# Altium PCB PCB3.PcbDoc (part 1 of 2)
Units mil, origin at the board's own origin, x right, y up, seen from the top; angles counter-clockwise.
Board outline 6000 x 4000 mil, 2 copper layers (Top Layer, Bottom Layer); 107 components, 78 nets, 393 pads, 135 vias.
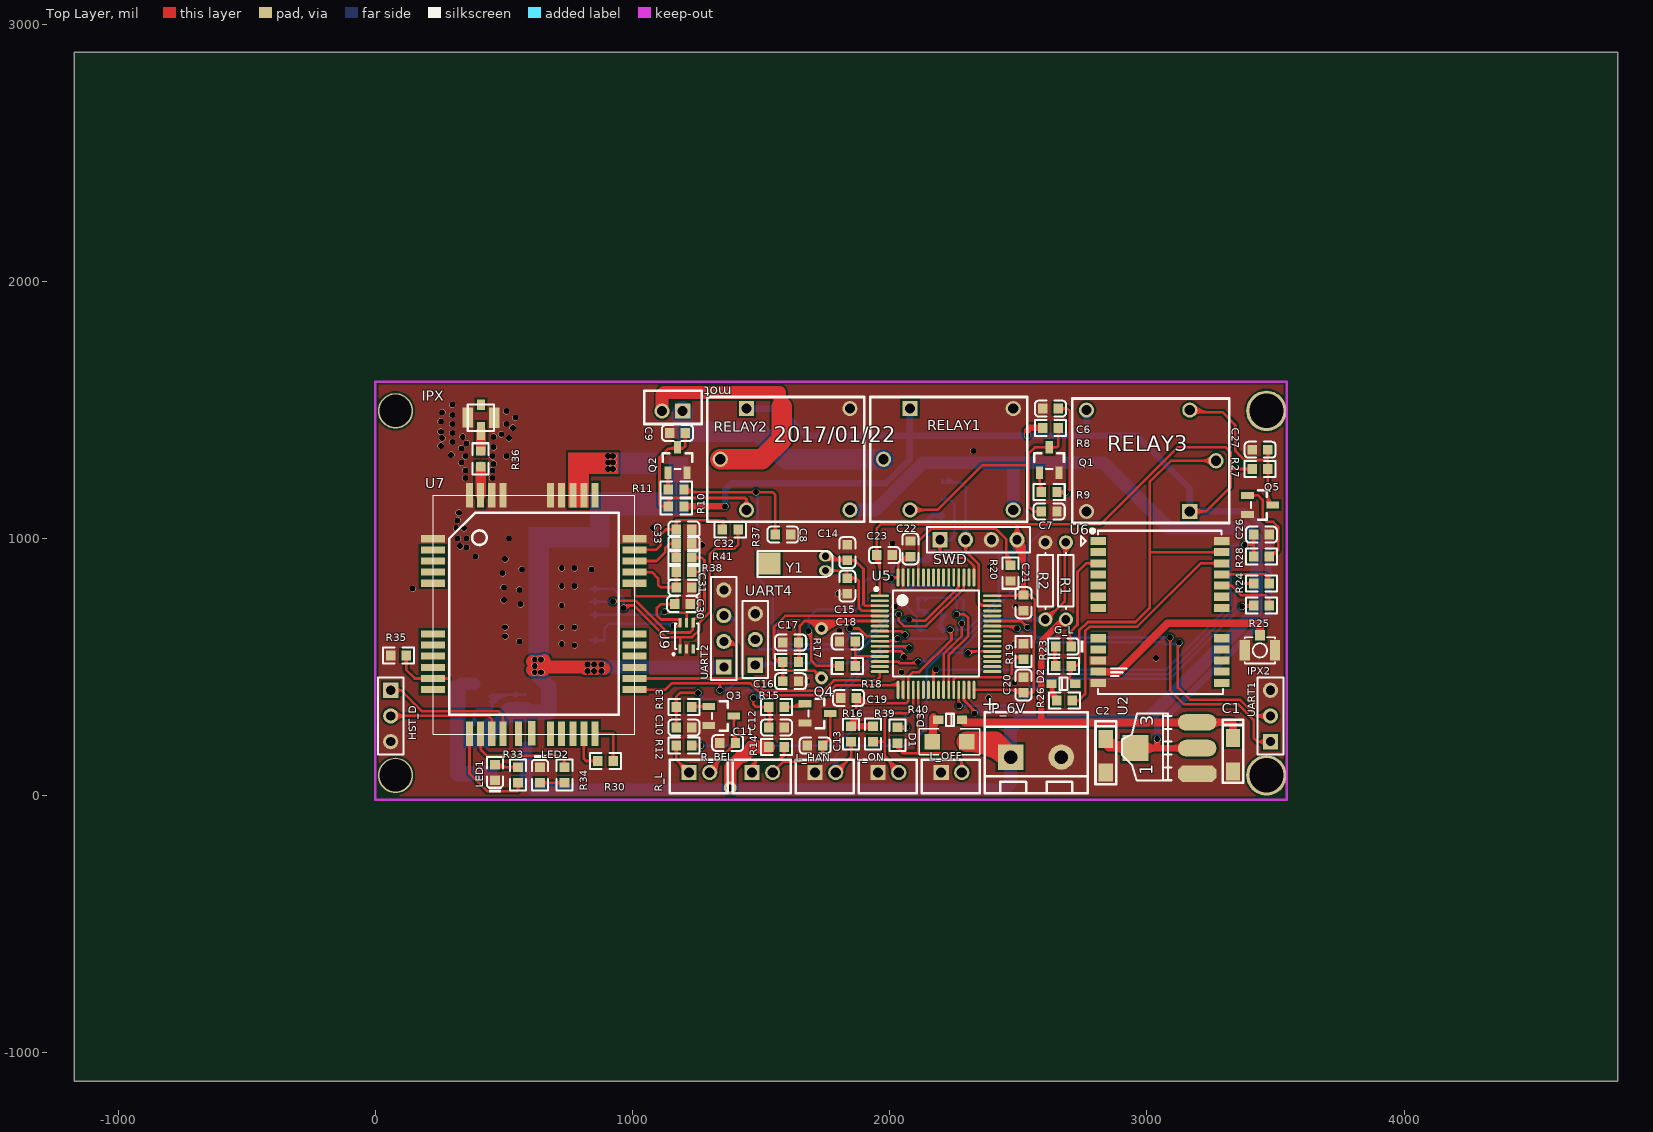
[diagram p0: Top Layer view]
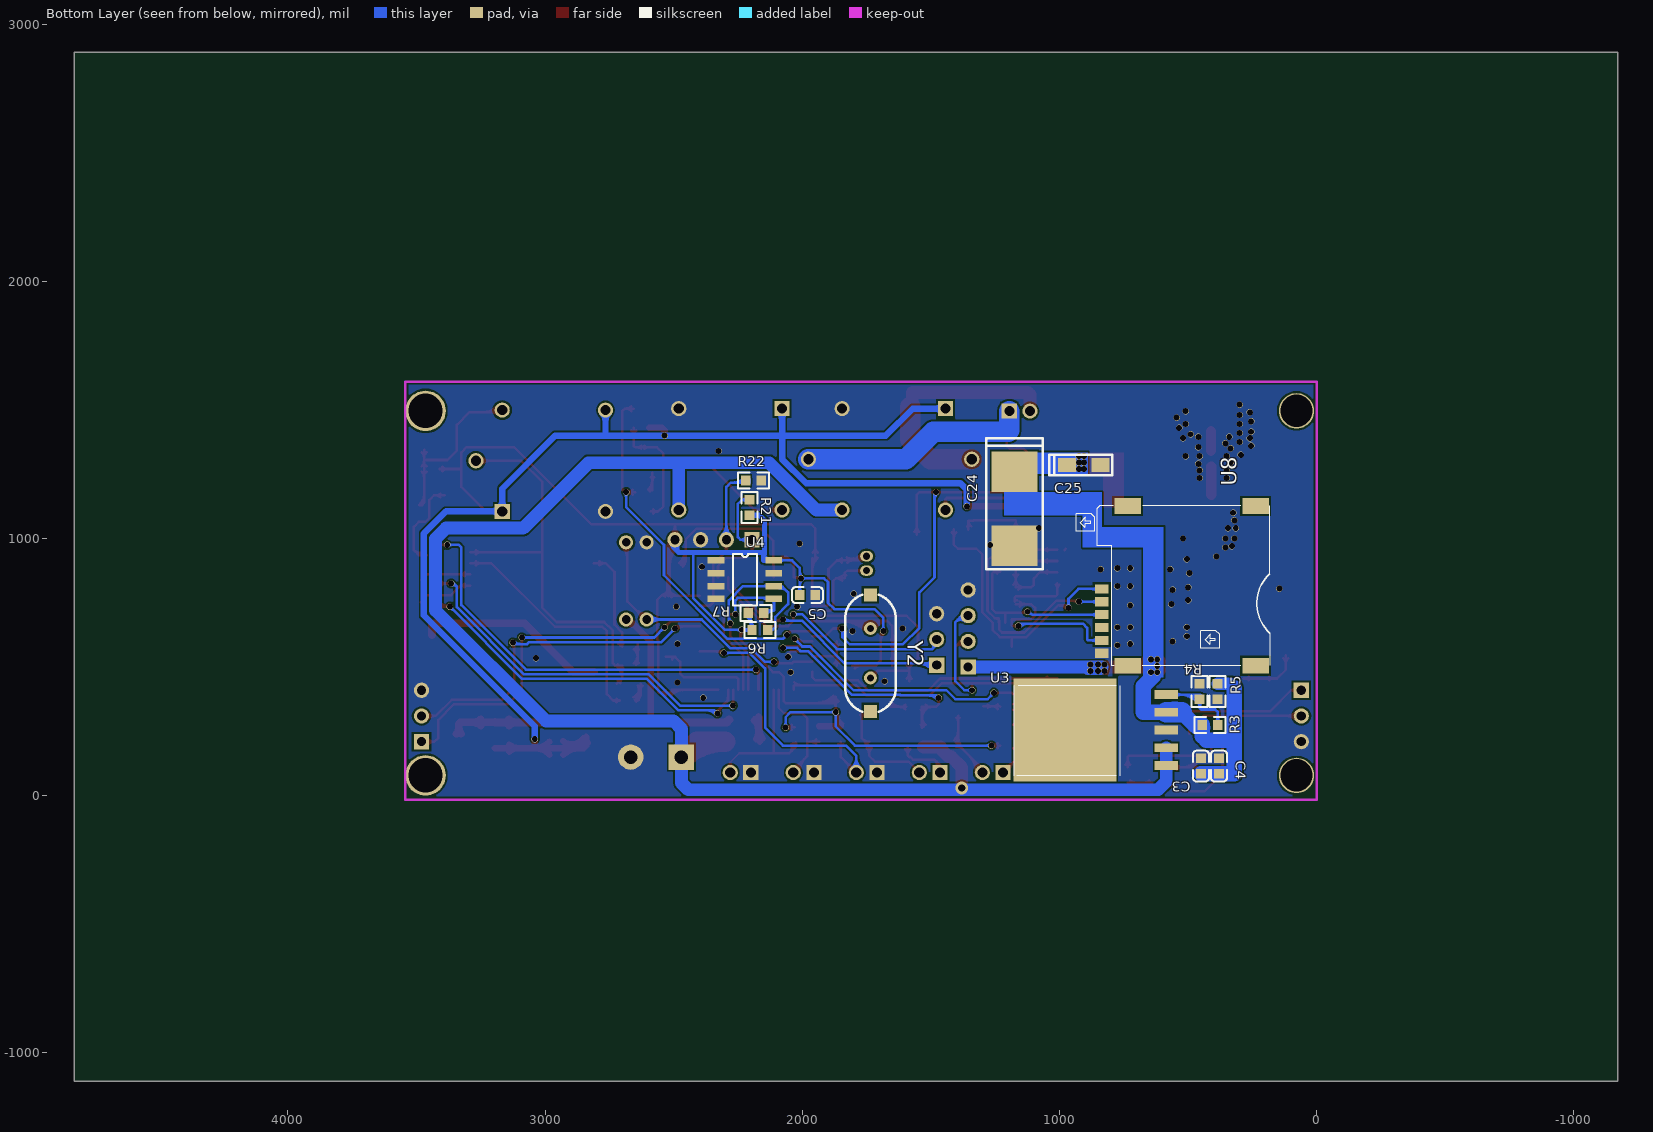
[diagram p1: Bottom Layer view, seen from below]
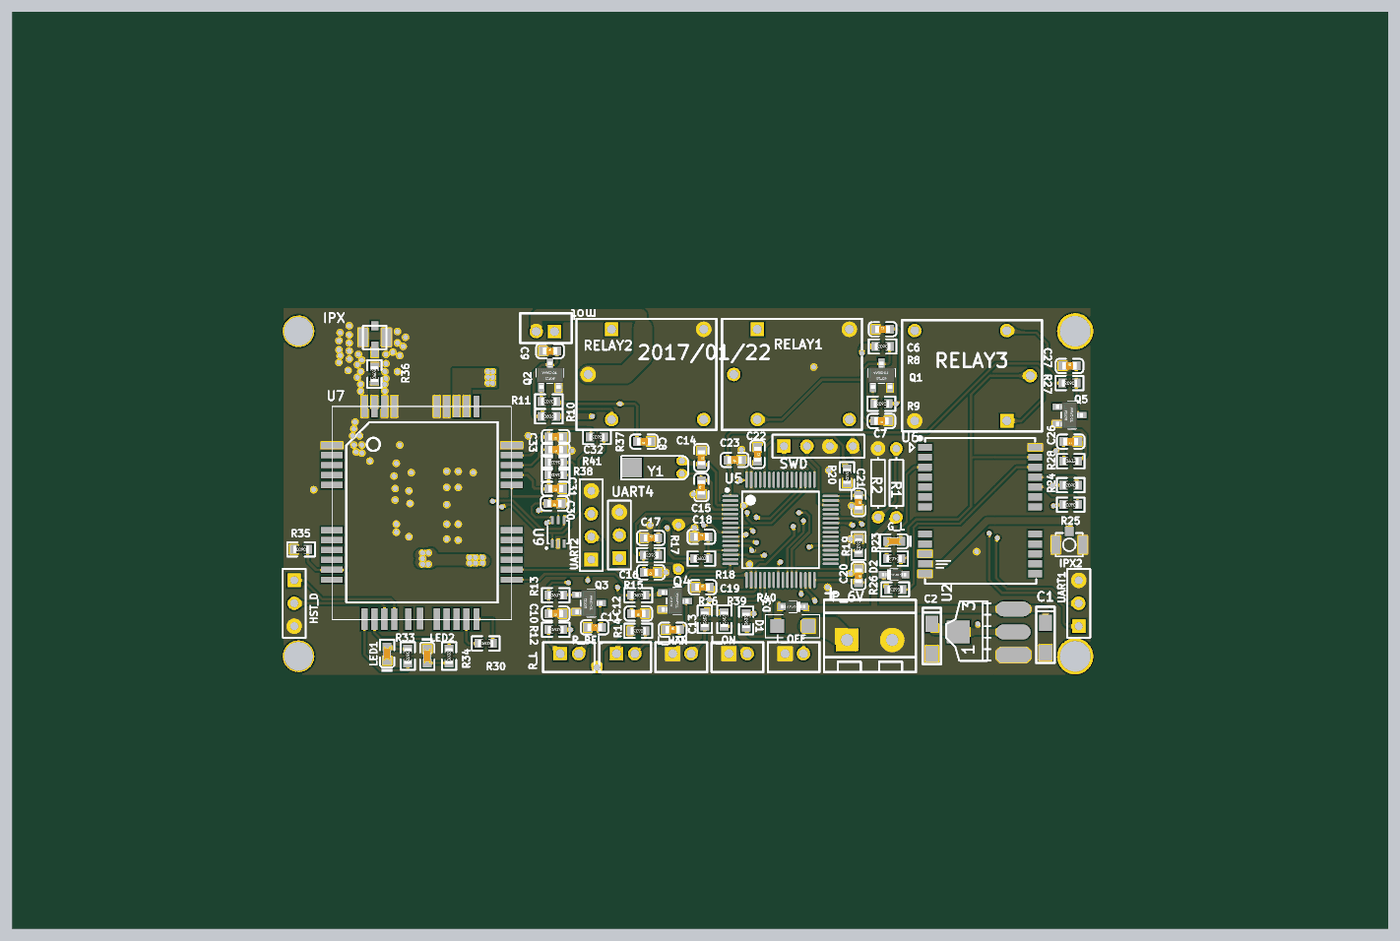
[diagram p3: 3D render of the assembled board from above, using the file's embedded part models]
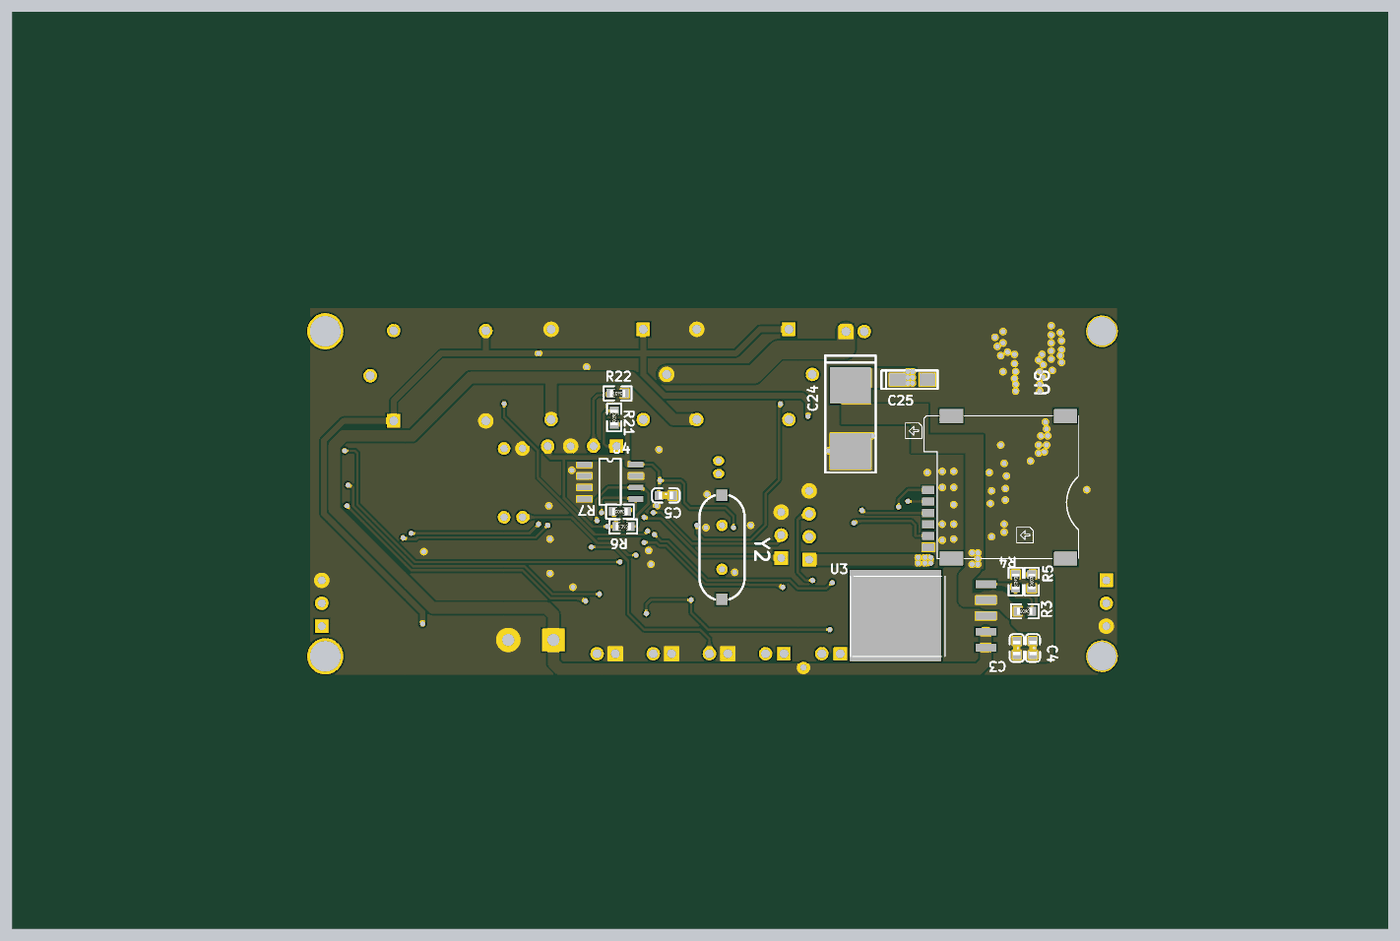
[diagram p4: 3D render of the assembled board from below, using the file's embedded part models]

## Layer stack, top to bottom
Top Layer: signal copper 1.4
Dielectric: core 12.6, FR-4, Dk 4.8
Bottom Layer: signal copper 1.4

## Board outline
-1170,-1110 4830,-1110 4830,2890 -1170,2890

## Design rules (kind name [scope] priority, off if disabled: settings)
Clearance [All] p1: gap=8
PolygonConnect [All] p1: connectstyle=Direct reliefconductorwidth=10 reliefentries=4 polygonreliefangle="90 Angle"
RoutingVias [All] p1: holewidth=20 width=30 viastyle="Through Hole" minholewidth=20 minwidth=20 maxholewidth=23 maxwidth=25
SilkscreenOverComponentPads [All] p1: minsilkscreentomaskgap=10
SolderMaskExpansion [All] p1: expansion=4
Width [All] p1: maxlimit=100 minlimit=10 preferedwidth=10
27 further rules are at their usual default settings.

## Components (designator, comment, footprint, x,y, rotation, side; value= is the part's Value field where it differs from the comment)
C1 "10uF" TANCAP 3335,225 r270 top
C2 "10uF" TANCAP 2840,220 r270 top
C3 "10uF (106) 10% 10V" 0603_C 450,115 r270 bottom
C4 "100nF (104) 10% 50V" 0603_C 380,115 r270 bottom
C5 "100nF (104) 10% 50V" 0603_C 1980,780 r180 bottom
C6 "100nF (104) 10% 50V" 0603_C 2625,1505 r0 top
C7 "100nF (104) 10% 50V" 0603_C 2620,1105 r180 top
C8 "100nF (104) 10% 50V" 0603_C 1585,1015 r180 top
C9 "100nF (104) 10% 50V" 0603_C 1175,1410 r0 top
C10 "100nF (104) 10% 50V" 0603_C 1200,265 r180 top
C11 "100nF (104) 10% 50V" 0603_C 1370,205 r0 top
C12 "100nF (104) 10% 50V" 0603_C 1560,265 r180 top
C13 "100nF (104) 10% 50V" 0603_C 1710,195 r0 top
C14 "10pF (100) 5% 50V" 0603_C 1835,945 r270 top
C15 "10pF (100) 5% 50V" 0603_C 1835,815 r90 top
C16 "22pF (220) 5% 50V" 0603_C 1615,445 r180 top
C17 "22pF (220) 5% 50V" 0603_C 1615,595 r0 top
C18 "100nF (104) 10% 50V" 0603_C 1835,600 r0 top
C19 "100nF (104) 10% 50V" 0603_C 1840,380 r0 top
C20 "100nF (104) 10% 50V" 0603_C 2520,430 r270 top
C21 "100nF (104) 10% 50V" 0603_C 2520,750 r270 top
C22 "100nF (104) 10% 50V" 0603_C 2080,960 r270 top
C23 "104" 0603_C 1980,935 r180 top
C24 "100uF (D)" 7343 1175,1260 r270 bottom
C25 "10uF (106) 10% 10V" TanCap 970,1285 r180 bottom
C26 "100nF (104) 10% 50V" 0603_C 3445,1015 r180 top
C27 "100nF (104) 10% 50V" 0603_C 3440,1345 r0 top
C30 "100nF (104) 10% 50V" 0603_C 1195,745 r180 top
C31 "33pF (330) 5% 50V" 0603_C 1200,810 r180 top
C32 "33pF (330) 5% 50V" 0603_C 1200,980 r180 top
C33 "33pF (330) 5% 50V" 0603_C 1200,1035 r180 top
D1 "SMB6V1A" 1206 2300,210 r180 top
D2 "1N4148WS T4" SOD-323 2675,435 r0 top
D3 "1N4148WS T4" SOD-323 2235,295 r180 top
G_L "*" 0603_LED_S1 2675,580 r180 top
HST_D "Header 3" HDR1X3 60,410 r270 top
IPX "Header 3" IPX 360,1470 r180 top
IPX2 "IPEX" IPEX 3380,565 r0 top
L_HAN "Header 2" COM2 1710,90 r0 top
L_OFF "Header 2" COM2 2200,90 r0 top
L_ON "Header 2" COM2 1955,90 r0 top
LED1 "*" 0603_LED_S1 465,90 r90 top
LED2 "*" 0603_LED_S1 640,80 r270 top
mot "Header 2" COM2 1195,1495 r180 top
P_6V "Header 2" HEAD2L-0.8 2470,150 r0 top
Q1 "SS8050 Y1" SOT-23(SOT-23-3) 2620,1305 r270 top
Q2 "SS8050 Y1" SOT-23(SOT-23-3) 1175,1305 r270 top
Q3 "SS8050 Y1" SOT-23(SOT-23-3) 1345,310 r180 top
Q4 "SS8050 Y1" SOT-23(SOT-23-3) 1720,320 r180 top
Q5 "SS8050 Y1" SOT-23(SOT-23-3) 3440,1130 r180 top
R1 "Res3" AXIAL-0.3 2685,835 r270 top
R2 "1K" AXIAL-0.3 2605,835 r90 top
R3 "100KΩ (1003) ±1%" 0603_R 415,275 r0 bottom
R4 "43KΩ (4302) ±1%" 0603_R 455,405 r270 bottom
R5 "470Ω (4700) ±1%" 0603_R 385,405 r90 bottom
R6 "1KΩ (1001) ±1%" 0603_R 2165,645 r0 bottom
R7 "1KΩ (1001) ±1%" 0603_R 2180,710 r0 bottom
R8 "10KΩ (1002) ±1%" 0603_R 2625,1430 r180 top
R9 "10KΩ (1002) ±1%" 0603_R 2620,1180 r180 top
R10 "10KΩ (1002) ±1%" 0603_R 1170,1125 r0 top
R11 "10KΩ (1002) ±1%" 0603_R 1170,1190 r180 top
R12 "10KΩ (1002) ±1%" 0603_R 1200,195 r0 top
R13 "1KΩ (1001) ±1%" 0603_R 1200,345 r0 top
R14 "0Ω (0) ±1%" 0603_R 1560,190 r180 top
R15 "1KΩ (1001) ±1%" 0603_R 1560,345 r0 top
R16 "*" 0603_R 1850,240 r90 top
R17 "1.5KΩ (1501) ±1%" 0603_R 1615,520 r180 top
R18 "0Ω (0R0) ±1%" 0603_R 1835,505 r0 top
R19 "0Ω (0R0) ±1%" 0603_R 2520,560 r270 top
R20 "0Ω (0R0) ±1%" 0603_R 2470,865 r270 top
R21 "*" 0603_R 2205,1120 r270 bottom
R22 "*" 0603_R 2190,1225 r0 bottom
R23 "510Ω (5100) ±1%" 0603_R 2675,505 r180 top
R24 "510R" 0603_R 3445,825 r180 top
R25 "510R" 0603_R 3445,740 r180 top
R26 "120Ω (1200) ±1%" 0603_R 2680,370 r180 top
R27 "10KΩ (1002) ±1%" 0603_R 3440,1270 r180 top
R28 "1KΩ (1001) ±1%" 0603_R 3445,930 r0 top
R30 "10KΩ (1002) ±1%" 0603_R 895,135 r0 top
R33 "1KΩ (1001) ±1%" 0603_R 555,80 r270 top
R34 "1KΩ (1001) ±1%" 0603_R 735,80 r90 top
R35 "0Ω (0R0) ±1%" 0603_R 90,545 r180 top
R36 "0Ω (0R0) ±1%" 0603_R 410,1309.69 r90 top
R37 "22Ω (22R0) ±1%" 0603_R 1380,1035 r180 top
R38 "22Ω (22R0) ±1%" 0603_R 1200,870 r180 top
R39 "*" 0603_R 1935,240 r90 top
R40 "*" 0603_R 2030,235 r90 top
R41 "22Ω (22R0) ±1%" 0603_R 1200,925 r180 top
R_BEL "Header 2" COM2 1465,90 r0 top
R_L "Header 2" COM2 1220,90 r0 top
RELAY1 "DED-T78-DC5VH-CS" SRA-05VDC-CL 1925,1550 r0 top
RELAY2 "DED-T78-DC5VH-CS" SRA-05VDC-CL 1290,1550 r0 top
RELAY3 "DED-T78-DC5VH-CS" SRA-05VDC-CL 3320,1060 r180 top
SWD "Header 4" HDR1X4 2195,995 r0 top
U2 "AMS1117-3.3" AMS1117 3195,85 r90 top
U3 "MIC2930BU" D2PAK 585,117 r90 bottom
U4 "24C02" SOP-8 2335,915 r180 bottom
U5 "STM32F103RCT6" LC-LQFP-64_10x10x05P 2180,630 r270 top
U6 "SkyTra_S1216F8-BD" GPS_NEO-6 2810,990 r0 top
U7 "G3524" PCBComponent_1 640,940 r0 top
U8 "Micro SIM" "Micro SIM" 735,505 r90 bottom
U9 "SMF05C" SMF05C 1185,570 r90 top
UART1 "Header 3" HDR1X3 3480,210 r90 top
UART2 "Header 4" HDR1X4 1355,500 r90 top
UART4 "Header 3" HDR1X3 1477.39,507.39 r90 top
Y1 "32.768KHz" XTAL32 1750,875 r180 top
Y2 "12MHz" XTAL_US 1735,650 r270 bottom

## Footprints (in the part's own frame and the unit in brackets; to place one, negate y for a bottom-side part, rotate by r counter-clockwise, add the part's x,y. Pads: shape width x height; smd on the part's side, far side on the other; paste and mask are expansions set on the pad)
0603_C [mm]
  rect 0.93x0.98 smd: 1(-0.77,0) 2(0.77,0)
  silkscreen extent -1.53,-0.79 1.54,0.79, body extent -0.8,-0.4 0.8,0.4, height 0.3
0603_LED_S1 [mm]
  rect 0.93x0.98 smd: A(0.77,0) K(-0.77,0)
  silkscreen extent -1.98,-0.79 1.54,0.79, body extent -0.8,-0.4 0.8,0.4, height 0.6
0603_R [mm]
  rect 0.93x0.98 smd: 1(-0.77,0) 2(0.77,0)
  silkscreen extent -1.53,-0.79 1.54,0.79, body extent -0.85,-0.4 0.85,0.4, height 0.56
1206 [mil]
  rect 60x60 smd: 1(0,0) 2(135,0)
  silkscreen extent -50,-50 185,50
7343 [mm]
  rect 4x4.5 smd: 1(0,0) 2(7.3,0)
  silkscreen extent -3.3,-2.79 9.65,2.79
AMS1117 [mil]
  oct 65x150 smd: 1(0.03,-0.06)
  oval 65x150 smd: 2(100.03,-0.06) 3(200.03,-0.06)
  rect 100x100 smd: 4(100.03,239.94)
  silkscreen extent -26,100 234,293
AXIAL-0.3 [mm] "Axial Device, Thru-Hole; 2 Leads; 0.3 in Pin Spacing"
  round 1.4 hole 0.85: 1(-3.81,0) 2(3.81,0)
  silkscreen extent -2.77,-0.76 2.77,0.76
COM2 [mm]
  rect 1.5x1.5 hole 1: 1(0,0)
  round 1.5 hole 1: 2(2.032,0)
  silkscreen extent -1.91,-2.03 3.81,1.27
D2PAK [mil]
  rect 34x90 smd: 1(0,0) 2(69,0) 3(138,0) 4(207,0) 5(276,0)
  rect 400x400 smd: ""(139,394)
  silkscreen extent -40,178 311,590
GPS_NEO-6 [mm]
  rect 1.524x0.8 smd: 1(0,0) 2(0,-1.1) 3(0,-2.2) 4(0,-3.3) 5(0,-4.4) 6(0,-5.5) 7(0,-6.6) 8(0,-9.6) 9(0,-10.7) 10(0,-11.8) 11(0,-12.9) 12(0,-14) 13(12.2,-14) 14(12.2,-12.9) 15(12.2,-11.8) 16(12.2,-10.7) 17(12.2,-9.6) 18(12.2,-6.6) 19(12.2,-5.5) 20(12.2,-4.4) 21(12.2,-3.3) 22(12.2,-2.2) 23(12.2,-1.1) 24(12.2,0)
  silkscreen extent -1.7,-15.11 12.32,1.15
HDR1X3 [mm] "Connector; Header; 3 Position"
  rect 1.5x1.5 hole 0.9: 1(0,0)
  round 1.5 hole 0.9: 2(2.54,0) 3(5.08,0)
  silkscreen extent -1.27,-1.27 6.35,1.27
HDR1X4 [mm] "Connector; Header; 4 Position"
  rect 1.5x1.5 hole 0.9: 1(0,0)
  round 1.5 hole 0.9: 2(2.54,0) 3(5.08,0) 4(7.62,0)
  silkscreen extent -1.27,-1.27 8.89,1.27
HEAD2L-0.8 [mm]
  rect 2.5x2.5 hole 1.35: 1(0,0)
  round 2.5 hole 1.35: 2(5,0)
  silkscreen extent -2.54,-3.56 7.62,4.44
IPEX [mm]
  rect 1x2 smd: 1(0,0) 3(3,0)
  rect 1x1.05 smd: 2(1.5,1.5)
  silkscreen extent 0,-1.3 3,1.3
IPX [mm]
  rect 1.054x2 smd: 1(0.009,0) 3(-2.591,0.025)
  rect 0.8x1.754 smd: 2(-1.295,1.33)
  rect 0.8x1 smd: ""(-1.295,-1.27)
  silkscreen extent -2.59,-1.27 0.01,1.33
LC-LQFP-64_10x10x05P [mm]
  oval 0.28x1.8 smd mask+0.051: 1(-3.75,-5.55) 2(-3.25,-5.55) 3(-2.75,-5.55) 4(-2.25,-5.55) 5(-1.75,-5.55) 6(-1.25,-5.55) 7(-0.75,-5.55) 8(-0.25,-5.55) 9(0.25,-5.55) 10(0.75,-5.55) 11(1.25,-5.55) 12(1.75,-5.55) 13(2.25,-5.55) 14(2.75,-5.55) 15(3.25,-5.55) 16(3.75,-5.55) 33(3.75,5.55) 34(3.25,5.55) 35(2.75,5.55) 36(2.25,5.55) 37(1.75,5.55) 38(1.25,5.55) 39(0.75,5.55) 40(0.25,5.55) 41(-0.25,5.55) 42(-0.75,5.55) 43(-1.25,5.55) 44(-1.75,5.55) 45(-2.25,5.55) 46(-2.75,5.55) 47(-3.25,5.55) 48(-3.75,5.55)
  oval 1.8x0.28 smd mask+0.051: 17(5.55,-3.75) 18(5.55,-3.25) 19(5.55,-2.75) 20(5.55,-2.25) 21(5.55,-1.75) 22(5.55,-1.25) 23(5.55,-0.75) 24(5.55,-0.25) 25(5.55,0.25) 26(5.55,0.75) 27(5.55,1.25) 28(5.55,1.75) 29(5.55,2.25) 30(5.55,2.75) 31(5.55,3.25) 32(5.55,3.75) 49(-5.55,3.75) 50(-5.55,3.25) 51(-5.55,2.75) 52(-5.55,2.25) 53(-5.55,1.75) 54(-5.55,1.25) 55(-5.55,0.75) 56(-5.55,0.25) 57(-5.55,-0.25) 58(-5.55,-0.75) 59(-5.55,-1.25) 60(-5.55,-1.75) 61(-5.55,-2.25) 62(-5.55,-2.75) 63(-5.55,-3.25) 64(-5.55,-3.75)
  silkscreen extent -4.55,-6.05 4.25,4.25
"Micro SIM" [mm] "6P 自?"
  rect 0.9x1.34 smd: 1(1.24,2.565) 2(2.51,2.565) 3(3.78,2.565) 4(5.05,2.565) 5(6.32,2.565) 6(7.59,2.565)
  rect 1.56x2.61 smd: ""(0,-12.63) ""(0,0) ""(15.78,-12.63) ""(15.78,0)
  silkscreen extent 0,-14.06 15.82,5.08
PCBComponent_1 [mm]
  rect 2.4x0.7 smd: 1(-10.55,1.5) 2(-10.55,0.4) 3(-10.55,-0.7) 4(-10.55,-1.8) 5(-10.55,-2.9) 6(-10.55,-7.9) 7(-10.55,-9) 8(-10.55,-10.1) 9(-10.55,-11.2) 10(-10.55,-12.3) 11(-10.55,-13.4) 21(9.35,-13.4) 22(9.35,-12.3) 23(9.35,-11.2) 24(9.35,-10.1) 25(9.35,-9) 26(9.35,-7.9) 27(9.35,-2.9) 28(9.35,-1.8) 29(9.35,-0.7) 30(9.35,0.4) 31(9.35,1.5)
  rect 0.7x2.4 smd: 12(-6.95,-17.75) 13(-5.85,-17.75) 14(-4.75,-17.75) 15(-3.65,-17.75) 16(1.05,-17.75) 17(2.15,-17.75) 18(3.25,-17.75) 19(4.35,-17.75) 20(5.45,-17.75) 32(5.45,5.8) 33(4.35,5.8) 34(3.25,5.8) 35(2.15,5.8) 36(1.05,5.8) 37(-3.65,5.8) 38(-4.75,5.8) 39(-5.85,5.8) 40(-6.95,5.8) 41(-2.1,-17.75) 42(-0.8,-17.7)
  silkscreen extent -10.55,-17.8 9.35,5.8
SMF05C [mm] "SOT-363"
  rect 0.9x0.3 smd: 1(0,0) 2(0,-0.65) 3(0,-1.3) 4(2.6,-1.3) 5(2.6,-0.65) 6(2.6,0)
  silkscreen extent -0.51,-1.84 2.54,0.64
SOD-323 [mm]
  rect 1x0.83 smd: 1(1.18,0) 2(-1.18,0)
  silkscreen extent -0.4,-0.6 0.4,0.6, body extent -1.35,-0.62 1.35,0.63, height 1.1
SOP-8 [mil]
  rect 65x25 smd: 1(0,0) 2(0,-50) 3(0,-100) 4(0,-150) 5(224.41,-150) 6(224.41,-100) 7(224.41,-50) 8(224.41,0)
  silkscreen extent 65,-175 159,25
SOT-23(SOT-23-3) [mm]
  rect 1.25x0.7 smd: 1(1.25,-0.95) 2(1.25,0.95) 3(-1.25,0)
  silkscreen extent -0.65,-1.46 0.9,1.46, body extent -1.5,-1.5 1.5,1.5, height 1.3
SRA-05VDC-CL [mm]
  rect 1.5x1.5 hole 1: 1(3.9,-1.15)
  round 1.5 hole 1: 2(1.302,-6.15) 3(3.9,-11.15) 4(14.1,-11.15) 5(14.1,-1.15)
  silkscreen extent 0,-12.3 15.5,0
TANCAP [mil]
  rect 70x55 smd: 1(0,0) 2(130,0)
  silkscreen extent -70,-40 175,40
TanCap [mil]
  rect 70x55 smd: 1(0,0) 2(130,0)
  silkscreen extent -70,-40 175,40
XTAL32 [mil]
  oval 50x40 hole 28: 1(0,0) 2(0,-56)
  rect 92.13x86 smd: ""(220,-27)
  silkscreen extent -28,-77 264,25
XTAL_US [mil]
  round 50 hole 28: 1(0,0) 2(192.13,0)
  rect 50x50 smd: ""(-130.32,0) ""(322.44,0)
  silkscreen extent -131,-98 323,98

## Part data
C1 C2: library part "CAPACITOR POL", "Capacitor"
C3: library part "0603 10uF (106) 10%", "ÌùÆ¬µ"
C4 C5 C6 C7 C8 C9 C10 C11 C12 C13 C18 C19 C20 C21 C22 C26 C27: library part "0603 100nF (104) 10%", "ÌùÆ¬µ"
C14 C15: library part "0603 10pF (100) 5%", "ÌùÆ¬µ"
C16 C17: library part "0603 22pF (220) 5%", "ÌùÆ¬µ"
C23 C24: library part 0, "ÌùÆ¬µ"
C25: library part "0603 10uF (1", "ÌùÆ¬µ"
C30: library part "0603 100nF (104)", "ÌùÆ¬µ"
C31 C32 C33: library part "0603 33pF (330) 5%", "ÌùÆ¬µ"
D1: library part SMBJ, "T"
D2 D3: library part "SOD-323 1N", "二极"
G_L: library part "0603 红灯", "发光"
HST_D IPX UART1 UART4: "Header, 3-Pin"
IPX2: "IPEX座"
L_HAN L_OFF L_ON mot R_BEL R_L: "Header, 2-Pin"
LED1 LED2: library part 0, "发光二"
P_6V: "Header, 2-P"
Q1 Q2 Q3 Q4 Q5: library part "SOT-23 SS", "三极"
R1: "Resistor"
R2: library part Res3, "Resistor"
R3: library part "0603 100KΩ (100", "贴片"
R4: library part "0603 43KΩ (430", "贴片"
R5: library part "0603 470Ω (470", "贴片"
R6 R7 R13 R15 R28 R33 R34: library part "0603 1KΩ (100", "贴片"
R8 R9 R10 R11 R12 R14 R27 R30: library part "0603 10KΩ (100", "贴片"
R16 R39 R40: library part "0603 4.7KΩ (470", "贴片"
R17: library part "0603 1.5KΩ (150", "贴片"
R18 R19 R20 R35 R36: library part "0603 0Ω (0R", "贴片"
R21 R22: library part 0603, "ÌùÆ¬µ"
R23: library part "0603 510Ω (510", "贴片"
R24 R25: library part R
R26: library part "0603 120Ω (120", "贴片"
R37 R38 R41: library part "0603 22Ω (22R", "贴片"
SWD UART2: "Header, 4-Pin"
U2: library part AMS11
U4: library part 24C2
U5: library part STM
U6: library part SkyTra_GPS
U7: library part Component_1
U9: "TVS"
Y1: library part XT, "Crystal Oscillat"
Y2: library part XT, "Crystal Oscil"

## Free pads (board coordinates)
  round 137.8 hole 125.98: 0(78.74,1496.06) 1(78.74,78.74)
  round 157.48 hole 133.86: 2(3464.57,78.74) 3(3464.57,1496.06)

## Via types
v1: diameter 25, hole 23, Top Layer to Bottom Layer, 134 vias
v2: diameter 50, hole 28, Top Layer to Bottom Layer, 1 vias

## Nets (pads, with @x,y where several pads share a name; then routed paths per layer and width w, separated by ;. In a path a pad name is that pad's centre, name@x,y a point inside that pad or via, vN(x,y) a via of type N, cw(c..) or ccw(c..) an arc to the next point about the centre after c; other vN are vias at no path point)
ADC0: R1.1 R2.1 U5.14 | length 1481.6
  Top Layer w10: U5.14@1961.5,521.73 1962.67,520.56 2034.44,520.56 2040.5,514.5 2104.5,514.5 v1(2110,520) ; 2078.62,514.5 ccw(c2078.62,551.38) v1@2104.7,525.3 ; R2.1@2600,675 2680,755 R1.1@2680,975 ; R2.1@2605,697.56 ccw(c2605,739.95) 2634.98,709.98 ; R2.1@2605,707.56 ccw(c2605,774.09) 2652.05,727.05 ; R2.1@2627.56,685 cw(c2669.95,685) 2639.98,714.98 ; R1.1@2669.05,969.05 cw(c2642.61,942.61) 2680,942.61 cw(c2727.39,942.61) R1.1@2693.88,976.12 ; 2680,918.47 cw(c2751.53,918.47) R1.1@2700.95,969.05
  Bottom Layer w10: v1(2110,520) 2144.54,520 2197.54,573 2278.91,573 2390.91,685 2590,685 R2.1@2600,675 ; v1@2115.3,514.7 cw(c2128.11,501.89) 2128.11,520 cw(c2128.11,538.11) v1@2115.3,525.3 ; R2.1@2589.05,669.05 ccw(c2550.54,630.54) 2550.54,685 ccw(c2550.54,739.46) R2.1@2589.05,700.95 ; R2.1@2596.12,676.12 ccw(c2574.68,654.68) 2574.68,685 ccw(c2574.68,715.32) R2.1@2596.12,693.88
G3524_RESET: U5.25
GND: C1.2 C2.2 C3.1 C4.1 C5.2 C6.1 C7.1 C8.1 C9.1 C10.1 C11.1 C12.1 C13.1 C14.1 C15.1 C16.1 C17.1 C18.1 C19.1 C20.1 C21.2 C22.1 C23.1 C24.2 C25.2 C26.1 C27.1 C30.1 C31.1 C32.1 C33.1 HST_D.3 IPX2.1 IPX2.3 IPX.1 IPX.3 L_HAN.1 L_OFF.1 L_ON.1 LED1.K LED2.K P_6V.2 Q1.2 Q2.2 Q3.2 Q4.2 Q5.2 R2.2 R4.1 R5.1 R19.1 R20.2 R22.1 R35.2 RELAY1.5 RELAY2.5 RELAY3.5 SWD.3 U2.1 U3.3 U4.1 U4.2 U4.3 U4.4 U4.7 U5.12 U5.18 U5.31 U5.47 U5.63 U6.10 U6.12 U6.24 U7.1 U7.31 U7.35 U7.36 U7.37 U7.38 U7.40 U8.1 U9.2 UART1.3 UART2.4 UART4.3 | length 128.1
  Top Layer w10: U5.12@1961.5,561.1 2043.9,561.1 ; v1@2047.96,542.59 ccw(c2031.47,548.67) 2043.9,561.1 ; v1(2055,540) 2055,550 2043.9,561.1
  other v1: 2385,380 2485,440 1680,445 2045,480 3035,535 775,585 725,590 2485,590 560,600 505,620 1805,640 1610,650 505,655 725,655 775,655 2020,735 2490,735 725,740 565,745 500,760 1800,785 560,800 145,805 500,810 725,815 775,815 495,865 570,880 840,880 725,885 775,885 2390,890 505,920 390,930 355,965 330,970 1270,975 2010,980 320,1000 355,1000 520,1000 315,1040 345,1040 1080,1040 320,1070 325,1100 350,1235 455,1235 350,1265 455,1265 460,1290 335,1295 350,1320 455,1320 510,1320 295,1325 2325,1340 335,1350 460,1355 255,1360 355,1370 300,1375 260,1390 520,1390 340,1395 460,1395 490,1405 300,1410 255,1415 535,1430 300,1445 510,1445 255,1455 545,1470 300,1480 260,1490 510,1495 300,1520
GPS_POWER_EN: C26.2 R28.1 U5.24 | length 1963.7
  Top Layer w10: 2170,467.64 cw(c2185.53,467.64) v1@2181.8,482.72 ; 2170,480.42 cw(c2182.37,480.42) v1@2179.4,492.43 ; U5.24@2170.16,411.5 2170.16,469.84 2170,470 2170,490 v1(2180,490) ; v1(3380,975) 3414.69,975 ; v1@3385.3,969.7 cw(c3398.11,956.89) 3398.11,975 cw(c3398.11,993.11) v1@3385.3,980.3 ; R28.1@3405.28,940.39 ccw(c3382.56,963.11) 3414.68,963.11 ccw(c3446.81,963.11) R28.1@3424.09,940.39 ; C26.2@3405.28,1004.61 cw(c3382.56,981.89) 3414.68,981.89 cw(c3446.81,981.89) C26.2@3424.09,1004.61 ; R28.1@3414.69,930 3414.69,975 ; C26.2@3414.69,1015 3414.69,975
  Bottom Layer w10: v1(2180,490) 3074.09,490 3325,740.91 3325,965 3335,975 v1(3380,975) ; v1@2185.3,484.7 cw(c2198.11,471.89) 2198.11,490 cw(c2198.11,508.11) v1@2185.3,495.3 ; v1@3374.7,969.7 ccw(c3361.89,956.89) 3361.89,975 ccw(c3361.89,993.11) v1@3374.7,980.3
GPS_RXD3: R24.2 U5.29 | length 1623.5
  Top Layer w10: v1@2264.7,355.3 ccw(c2255.32,364.68) 2268.58,364.68 ; 2268.58,371.53 ccw(c2291.53,371.53) v1@2275.3,355.3 ; U5.29@2268.58,411.5 2268.58,356.42 2270,355 v1(2270,350) v1@2270,345 ; v1(3365,825) R24.2@3414.68,825 ; v1@3370.3,819.7 cw(c3383.11,806.89) 3383.11,825 cw(c3383.11,843.11) v1@3370.3,830.3 ; R24.2@3405.28,815.59 ccw(c3382.56,792.87) 3382.56,825 ccw(c3382.56,857.13) R24.2@3405.28,834.41
  Bottom Layer w10: v1(2270,350) 2270,340 2280,350 2474.54,350 2596.54,472 3081.54,472 3343,733.46 3343,813 ; v1@2275.3,344.7 cw(c2288.11,331.89) 2288.11,350 cw(c2288.11,368.11) v1@2275.3,355.3 ; v1@3360,830 3343,813 ; v1@3362.75,817.84 ccw(c3356.87,799.13) 3343,813
GPS_TXD3: R25.2 U5.30 | length 1647
  Top Layer w10: U5.30@2288.27,411.5 2288.27,371.73 2330,330 v1(2330,320) v1@2335,320 ; U5.30@2288.78,381.57 ccw(c2313.78,381.57) 2296.1,363.9 ; 2310.13,349.87 cw(c2280.25,320) v1@2322.5,320 ; 2327.2,332.8 cw(c2314.39,320) v1@2332.5,320 ; v1(3370,735) R25.2@3414.68,735 ; v1@3372.86,735 ccw(c3372.86,780.84) R25.2@3405.28,748.43 ; v1@3373.75,741.5 ccw(c3384.07,759.37) 3389.41,739.43 ; v1@3375.3,729.7 cw(c3388.11,716.89) 3388.11,735 cw(c3388.11,753.11) v1@3375.3,740.3 ; v1@3376.5,731.25 cw(c3389.98,723.46) 3385.95,738.51 ; 3392.25,735 cw(c3392.25,716.58) R25.2@3405.28,729.61
  Bottom Layer w10: v1@2328.23,321.77 cw(c2352.94,297.07) 2352.94,332 ; v1(2330,320) 2342,332 2482,332 2604,454 3089,454 v1(3370,735) ; v1@2335.3,314.7 cw(c2377.08,272.92) 2377.08,332 ; v1@3362.5,735 cw(c3344.39,735) 3357.2,722.2 cw(c3370,709.39) v1@3370,727.5
GPS_VCC_EN: D2.1 R23.1 RELAY3.2 U6.23 | length 1930.3
  Top Layer w10: R23.1@2695.91,494.61 cw(c2685.26,483.96) 2700.31,483.96 cw(c2725.37,483.96) R23.1@2707.65,501.68 ; 2700.31,459.82 cw(c2749.51,459.82) R23.1@2714.72,494.61 ; 2704.47,451.99 ccw(c2718.11,465.63) D2.1@2718.11,446.34 ; D2.1@2706.88,436.56 ccw(c2683.93,439.76) 2700.32,456.14 ; R23.1@2717.27,499.16 cw(c2726.62,494.6) 2726.62,505 ; R23.1@2717.27,510.84 ccw(c2726.62,515.4) 2726.62,505 ; D2.1@2721.46,435 2700.31,456.14 ; 3016.69,946.69 U6.23@3290.31,946.69 ; RELAY3.2@3251.4,1284.78 ccw(c3209.53,1242.91) 3209.53,1302.13 ccw(c3209.53,1361.34) RELAY3.2@3251.4,1319.47 ; RELAY3.2@3258.47,1291.85 ccw(c3233.67,1267.05) 3233.67,1302.13 ccw(c3233.67,1337.2) RELAY3.2@3258.47,1312.4 ; U6.23@3268.46,939.09 ccw(c3250.11,920.74) 3250.11,946.69 ccw(c3250.11,972.64) U6.23@3268.46,954.29 ; RELAY3.2@3268.74,1302.13 3092.87,1302.13 3010,1219.25 3010,730.46 2954.82,675.27 2770.27,675.27 2736.62,641.62 2736.62,515 2726.62,505 ; 2700.31,456.14 2700.31,505 2726.62,505
HST_RXD: HST_D.2 U7.14 | length 635.6
  Top Layer w10: HST_D.2@60,310 440,310 452.99,297.01 U7.14@452.99,241.18 ; HST_D.2@70.27,299.73 cw(c95.07,274.93) 95.07,310 cw(c95.07,345.07) HST_D.2@70.27,320.27 ; HST_D.2@77.34,292.66 cw(c119.21,250.79) 119.21,310 cw(c119.21,369.21) HST_D.2@77.34,327.34 ; U7.14@446.78,280.85 ccw(c431.8,295.84) 452.99,295.84 ccw(c474.19,295.84) U7.14@459.2,280.85
HST_TXD: HST_D.1 U7.15 | length 625.6
  Top Layer w10: HST_D.1@60,410 100,410 ; HST_D.1@81.86,398.88 cw(c100,389.65) 100,410 ; HST_D.1@81.86,421.12 ccw(c100,430.35) 100,410 ; U7.15@490.09,280.85 ccw(c475.1,295.84) 496.3,295.84 ccw(c517.49,295.84) U7.15@502.51,280.85 ; U7.15@496.3,241.18 496.3,311.7 480,328 182,328 100,410
IIC_SCL: R6.1 U4.6 U5.26 | length 994.2
  Top Layer w10: U5.26@2209.53,411.5 2209.53,549.98 2280,620.46 v1(2280,670) ; v1@2274.7,664.7 cw(c2261.89,651.89) 2280,651.89 cw(c2298.11,651.89) v1@2285.3,664.7
  Bottom Layer w10: 2059.71,794.71 cw(c2090.59,763.82) U4.6@2090.59,807.5 ; 2076.78,811.78 cw(c2090.59,797.96) U4.6@2090.59,817.5 ; R6.1@2122.34,640.04 ccw(c2115,637.09) 2115,645 ; R6.1@2122.34,649.96 cw(c2115,652.91) 2115,645 ; R6.1@2134.69,645 2115,645 ; U4.6@2135.89,809.7 cw(c2148.7,796.89) 2148.7,815 cw(c2148.7,833.11) U4.6@2135.89,820.3 ; v1@2274.7,675.3 ccw(c2248.62,701.38) 2285.5,701.38 ; v1(2280,670) 2275,670 2285.5,680.5 2285.5,759.5 2230,815 U4.6@2110.59,815 2080,815 2055,790 2055,744.69 2105,694.69 2105,655 2115,645
IIC_SDA: R7.1 U4.5 U5.27 | length 819.8
  Top Layer w10: U5.27@2229.21,411.5 2229.21,544.21 2305.5,620.5 2305.5,690 2290.5,705 v1(2260,705) ; v1@2265.3,699.7 cw(c2278.11,686.89) 2278.11,705 cw(c2278.11,723.11) v1@2265.3,710.3
  Bottom Layer w10: U4.5@2105.29,759.7 cw(c2093.91,748.32) 2110,748.32 ; 2110,745.47 cw(c2130.13,745.47) U4.5@2115.89,759.7 ; 2127.78,720 cw(c2127.78,697.67) R7.1@2146.86,709.27 ; U4.5@2135.89,759.7 cw(c2160.77,734.82) 2160.77,770 ; R7.1@2138.31,704.07 ccw(c2110,686.87) 2110,720 ; R7.1@2139.69,720 2110,720 ; v1@2254.7,710.3 ccw(c2241.89,723.11) 2260,723.11 ccw(c2278.11,723.11) v1@2265.3,710.3 ; v1(2260,705) 2260,759.54 2249.55,770 2110.59,770 2110,769.41 2110,720
LOCK_HAND: L_HAN.2 R16.1 U5.37 | length 1535.8
  Top Layer w10: L_HAN.2@1790,90 1850,150 R16.1@1850,209.69 ; L_HAN.2@1790,104.53 ccw(c1790,139.6) 1814.8,114.8 ccw(c1839.6,90) L_HAN.2@1804.53,90 ; L_HAN.2@1790,114.53 ccw(c1790,173.74) 1831.87,131.87 ccw(c1873.74,90) L_HAN.2@1814.53,90 ; R16.1@1840.59,200.28 cw(c1817.87,177.56) 1850,177.56 cw(c1882.13,177.56) R16.1@1859.41,200.28 ; v1(2305,555) 2301.1,558.9 2301.1,561.1 U5.37@2398.5,561.1 ; v1@2310.3,549.7 cw(c2337.84,522.16) 2337.84,561.1
  Bottom Layer w10: L_HAN.2@1772.66,107.34 ccw(c1730.79,149.21) 1790,149.21 ccw(c1849.21,149.21) L_HAN.2@1807.34,107.34 ; L_HAN.2@1779.73,100.27 ccw(c1754.93,125.07) 1790,125.07 ccw(c1825.07,125.07) L_HAN.2@1800.27,100.27 ; L_HAN.2@1790,90 1790,155 1830,195 2075,195 2144.5,264.5 2144.5,494.5 2205,555 v1(2305,555) ; v1@2299.7,549.7 ccw(c2286.89,536.89) 2286.89,555 ccw(c2286.89,573.11) v1@2299.7,560.3
LOCK_OFF: L_OFF.2 R40.1 U5.21 | length 733.4
  Top Layer w10: R40.1@2024.82,207.29 ccw(c2042.7,199.75) 2028.98,186.02 ; R40.1@2025.04,192.34 cw(c2022.09,185) 2030,185 ; R40.1@2030,204.69 2030,185 ; R40.1@2034.03,203.4 ccw(c2057.49,193.51) 2039.49,175.51 ; R40.1@2034.96,192.34 ccw(c2037.91,185) 2030,185 ; R40.1@2043.25,199.52 ccw(c2072.27,187.28) 2050,165 ; U5.21@2111.1,411.5 2111.1,166.1 2110,165 ; L_OFF.2@2268.88,111.86 ccw(c2259.65,130) 2280,130 ; L_OFF.2@2280,90 2280,130 ; L_OFF.2@2291.12,111.86 cw(c2300.35,130) 2280,130 ; 2030,185 2050,165 ; 2050,165 2110,165 ; 2110,165 2245,165 2280,130
LOCK_ON: L_ON.2 R39.1 U5.20 | length 666.1
  Top Layer w10: R39.1@1935,209.69 1979.69,209.69 ; R39.1@1945.39,200.28 cw(c1968.11,177.56) 1968.11,209.69 cw(c1968.11,241.81) R39.1@1945.39,219.09 ; 1986.06,148.94 cw(c1927.12,90) L_ON.2@2010.47,90 ; 2003.13,131.87 cw(c1961.26,90) L_ON.2@2020.47,90 ; 2010.2,124.8 ccw(c2035,149.6) L_ON.2@2035,114.53 ; L_ON.2@2035,90 2035,100 1980,155 1980,300 2000,320 2070,320 2091.42,341.42 U5.20@2091.42,411.5
MOTO-A: mot.2 RELAY2.2 | length 981.4
  Top Layer w50: mot.2@1115,1495 1115,1560 1122.25,1567.25 1572.25,1567.25 1572.25,1519.75 1580,1512
  Top Layer w80: RELAY2.2@1341.26,1307.87 1502.87,1307.87 1580,1385 1580,1512
MOTO-B: mot.1 RELAY1.2 | length 902.7
  Bottom Layer w80: mot.1@1195,1495 1195,1420 1200,1415 1490,1415 1597.13,1307.87 RELAY1.2@1976.26,1307.87
MOTO_D+: C6.2 R9.1 U5.8 | length 1763.7
  Top Layer w10: U5.8@1961.5,639.84 2039.84,639.84 ; 2040,640 2039.84,639.84 ; v1@2052.5,625 ccw(c2034.39,625) 2047.2,637.8 ccw(c2060,650.61) v1@2060,632.5 ; v1(2060,625) 2045.16,639.84 2039.84,639.84 ; R9.1@2650.31,1180 v1(2685,1180) 2690,1180 2700,1190 ; C6.2@2655.31,1505 2690,1505 2700,1495 2700,1190 ; R9.1@2659.72,1170.59 cw(c2682.44,1147.87) 2682.44,1180 cw(c2682.44,1212.13) R9.1@2659.72,1189.41 ; C6.2@2664.72,1495.59 cw(c2687.44,1472.87) 2687.44,1505 cw(c2687.44,1537.13) C6.2@2664.72,1514.41 ; R9.1@2667.49,1175.99 cw(c2671.71,1160.22) v1@2680.82,1173.77 ; R9.1@2667.49,1184.01 ccw(c2671.71,1199.78) v1@2680.82,1186.23 ; 2668.88,1176.37 ccw(c2664.78,1191.67) v1@2678.5,1183.75 ; 2668.88,1183.63 cw(c2664.78,1168.33) v1@2678.5,1176.25 ; v1@2679.7,1174.7 ccw(c2666.89,1161.89) 2666.89,1180 ccw(c2666.89,1198.11) v1@2679.7,1185.3 ; v1@2687.44,1187.09 ccw(c2691.39,1198.61) 2700,1190
  Bottom Layer w10: v1@2060,617.5 cw(c2060,599.39) 2072.8,612.2 cw(c2085.61,625) v1@2067.5,625 ; v1(2060,625) 2075,610 2290.46,610 2537.53,857.07 2537.53,974.89 2685,1122.36 v1(2685,1180) ; v1@2679.7,1174.7 cw(c2666.89,1161.89) 2685,1161.89 cw(c2703.11,1161.89) v1@2690.3,1174.7
MOTO_D-: C8.2 R11.1 U5.9 | length 1841.5
  Top Layer w10: R11.1@1195.31,1180 v1(1480,1180) 1545,1180 1554.68,1170.32 C8.2@1554.68,1015 ; R11.1@1202.65,1191.35 ccw(c1230.07,1218.77) 1230.07,1180 ; R11.1@1209.72,1198.43 ccw(c1254.21,1242.91) 1254.21,1180 ; v1@1474.7,1174.7 ccw(c1461.89,1161.89) 1461.89,1180 ccw(c1461.89,1198.11) v1@1474.7,1185.3 ; v1@1485.3,1174.7 cw(c1498.11,1161.89) 1498.11,1180 cw(c1498.11,1198.11) v1@1485.3,1185.3 ; C8.2@1545.28,1025.39 ccw(c1522.56,1048.11) 1554.68,1048.11 ccw(c1586.81,1048.11) C8.2@1564.09,1025.39 ; v1(1845,650) 1880,650 1909.84,620.16 U5.9@1961.5,620.16 ; v1@1850.3,644.7 cw(c1863.11,631.89) 1863.11,650 cw(c1863.11,668.11) v1@1850.3,655.3
  Bottom Layer w10: v1@1474.7,1174.7 cw(c1447.24,1147.24) 1486.07,1147.24 ; v1@1486.07,1173.93 1486.07,848.93 1545,790 1545,652.53 1609.53,588 1815.47,588 1843.74,616.26 1843.74,643.74 1841.24,646.24 v1(1845,650) ; v1@1839.7,644.7 cw(c1829.94,634.94) 1843.74,634.94 ; 1843.74,628.84 cw(c1866.16,628.84) v1@1850.3,644.7
NetC1_1: C1.1 D3.2 R1.2 U2.3 | length 1799.4
  Top Layer w25: 2585,284.5 2588.36,287.86 2588.36,595.26 2589.94,596.85 2589.94,600.38 2674.56,685 R1.2@2685,685 ; 2641.47,651.91 cw(c2685,608.38) R1.2@2685,669.94
  Top Layer w30: D3.2@2281.46,295 2291.96,284.5 2585,284.5 2799.47,284.5 U2.3@3194.53,284.5 ; D3.2@2285.75,295.95 ccw(c2313.38,323.58) 2313.38,284.5 ; 3109.03,284.5 ccw(c3109.03,328.57) U2.3@3140.19,297.41 ; 3111.6,284.5 cw(c3111.6,244.07) U2.3@3140.19,272.66 ; U2.3@3193.1,287 U2.3@3195.06,285.03 3329.97,285.03 3335,280 C1.1@3335,250 ; U2.3@3249.94,272.66 cw(c3279.81,242.78) 3279.81,285.03 cw(c3279.81,327.28) U2.3@3249.94,297.41 ; C1.1@3326.16,241.34 ccw(c3304.82,262.68) 3335,262.68 ccw(c3365.18,262.68) C1.1@3343.84,241.34
NetC7_2: C7.2 Q1.3 R8.1 RELAY1.3 | length 1303.8
  Top Layer w10: RELAY1.3@2078.54,1111.02 2186.02,1111.02 2360,1285 2540,1285 ; RELAY1.3@2088.82,1100.75 cw(c2113.62,1075.95) 2113.62,1111.02 cw(c2113.62,1146.1) RELAY1.3@2088.82,1121.3 ; RELAY1.3@2095.89,1093.68 cw(c2137.76,1051.81) 2137.76,1111.02 cw(c2137.76,1170.24) RELAY1.3@2095.89,1128.37 ; C7.2@2579.75,1096.15 ccw(c2560,1078.55) 2560,1105 ; C7.2@2579.75,1113.85 cw(c2560,1131.45) 2560,1105 ; C7.2@2589.69,1105 2560,1105 ; Q1.3@2613.79,1348 ccw(c2598.8,1333.02) 2598.8,1354.21 ccw(c2598.8,1375.41) Q1.3@2613.79,1360.42 ; Q1.3@2626.21,1348 cw(c2641.2,1333.02) 2641.2,1354.21 cw(c2641.2,1375.41) Q1.3@2626.21,1360.42 ; R8.1@2645.91,1419.61 cw(c2623.19,1396.89) 2655.31,1396.89 cw(c2687.44,1396.89) R8.1@2664.72,1419.61 ; R8.1@2655.31,1430 2655.31,1360.31 2649.21,1354.21 Q1.3@2620,1354.21 2564.21,1354.21 2540,1330 2540,1285 ; 2540,1285 2540,1125 2560,1105
NetC9_2: C9.2 Q2.3 R10.1 RELAY2.3 | length 1021.2
  Top Layer w10: R10.1@1129.75,1116.15 ccw(c1110,1098.55) 1110,1125 ; R10.1@1129.75,1133.85 cw(c1110,1151.45) 1110,1125 ; R10.1@1133.79,1137.92 ccw(c1129.12,1147.39) 1139.69,1147.39 ; 1141.73,1349.21 ccw(c1141.73,1387.48) Q2.3@1168.79,1360.42 ; R10.1@1142.08,1128.27 cw(c1153.36,1139.02) 1142.34,1150.05 ; R10.1@1145.58,1137.92 cw(c1150.25,1147.39) 1139.69,1147.39 ; R10.1@1149.32,1135.17 cw(c1160.78,1146.09) 1149.58,1157.29 ; Q2.3@1183.32,1357.03 ccw(c1194.21,1360.72) 1194.21,1349.21 ; C9.2@1195.91,1399.61 cw(c1173.19,1376.89) 1205.32,1376.89 cw(c1237.44,1376.89) C9.2@1214.72,1399.61 ; C9.2@1205.32,1410 1205.32,1360.32 1194.21,1349.21 ; RELAY2.3@1432.21,1132.78 ccw(c1422.48,1151.45) 1443.54,1151.45 ; RELAY2.3@1443.54,1111.02 1443.54,1151.46 ; RELAY2.3@1454.87,1132.78 cw(c1464.6,1151.45) 1443.54,1151.45 ; 1110,1125 R10.1@1139.69,1125 1139.69,1147.39 ; 1110,1125 1105,1130 1105,1315 1139.21,1349.21 1194.21,1349.21 ; 1139.69,1147.39 1149.58,1157.29 ; 1149.58,1157.29 1437.71,1157.29 1443.54,1151.46
NetC11_2: C11.2 Q3.3 R_L.2 | length 597.1
  Top Layer w10: R_L.2@1300,90 1300,104.68 C11.2@1400.32,205 ; R_L.2@1300,114.53 ccw(c1300,138.29) 1316.8,121.49 ; R_L.2@1304.53,90 cw(c1350.91,90) 1318.11,122.8 ; R_L.2@1314.53,90 cw(c1385.05,90) 1335.18,139.87 ; R_L.2@1324.53,90 cw(c1419.19,90) 1352.25,156.94 ; 1375.92,180.6 cw(c1400.32,156.21) C11.2@1400.32,190.71 ; 1378.29,182.98 ccw(c1357.26,204.02) C11.2@1387.01,204.02 ; Q3.3@1388,303.79 cw(c1373.02,288.8) 1394.21,288.8 cw(c1415.41,288.8) Q3.3@1400.42,303.79 ; C11.2@1390.91,215.39 ccw(c1382.92,223.38) C11.2@1394.21,223.38 ; C11.2@1394.21,211.1 Q3.3@1394.21,310 ; 1394.21,228.7 ccw(c1423.03,228.7) C11.2@1402.65,208.32 ; 1394.21,252.84 ccw(c1447.17,252.84) C11.2@1409.72,215.39
NetC13_2: C13.2 Q4.3 R_BEL.2 | length 533.2
  Top Layer w10: R_BEL.2@1545,90 1587.53,132.53 1717.53,132.53 1740.32,155.32 C13.2@1740.32,195 1769.21,223.9 Q4.3@1769.21,320 ; C13.2@1730.91,184.61 cw(c1708.19,161.89) 1740.32,161.89 cw(c1772.44,161.89) C13.2@1749.72,184.61 ; C13.2@1740.32,209.29 ccw(c1740.32,243.79) 1764.71,219.4 ; C13.2@1753.62,195.98 cw(c1783.37,195.98) 1762.34,217.02 ; Q4.3@1763,313.79 cw(c1748.02,298.8) 1769.21,298.8 cw(c1790.41,298.8) Q4.3@1775.42,313.79
NetC14_2: C14.2 U5.3 Y1.2 | length 675.9
  Top Layer w10: Y1.2@1750,931 1766.32,914.68 C14.2@1835,914.68 1865.32,914.68 ; Y1.2@1751.46,927.46 ccw(c1782.32,958.32) 1782.32,914.68 ; Y1.2@1758.54,934.54 ccw(c1806.46,982.46) 1806.46,914.68 ; Y1.2@1765.61,941.61 ccw(c1830.6,1006.6) C14.2@1830.6,914.68 ; 1800.71,922.22 ccw(c1809.26,956.14) C14.2@1827.19,926.11 ; 1804.61,921.24 cw(c1797.46,892.85) C14.2@1822.59,907.86 ; C14.2@1824.61,905.28 ccw(c1801.89,882.56) 1801.89,914.68 ccw(c1801.89,946.81) C14.2@1824.61,924.09 ; C14.2@1846,905.92 cw(c1865.31,889.02) 1865.31,914.68 ; C14.2@1846,923.45 ccw(c1865.31,940.35) 1865.31,914.68 ; U5.3@1961.5,738.27 1904.73,738.27 1898,745 1898,882 1865.32,914.68
NetC15_2: C15.2 U5.4 Y1.1 | length 475.5
  Top Layer w10: Y1.1@1750,875 1825,875 1835,865 ; Y1.1@1765.61,864.39 cw(c1791.21,838.79) 1791.21,875 cw(c1791.21,911.21) Y1.1@1765.61,885.61 ; C15.2@1830.04,857.66 ccw(c1827.09,865) 1835,865 ; C15.2@1839.96,857.66 cw(c1842.91,865) 1835,865 ; C15.2@1845.39,835.91 cw(c1868.11,813.19) 1868.11,845.32 cw(c1868.11,877.44) C15.2@1845.39,854.72 ; U5.4@1961.5,718.58 1891.42,718.58 1880,730 1880,835 1869.68,845.32 C15.2@1835,845.32 1835,865
NetC16_2: C16.2 R17.2 U5.5 Y2.2 | length 1053.5
  Top Layer w10: 1558.72,526.28 ccw(c1572.36,539.91) R17.2@1582.88,523.76 ; R17.2@1572.34,515.04 ccw(c1565,512.09) 1565,520 ; R17.2@1572.34,524.96 cw(c1565,527.91) 1565,520 ; C16.2@1575.28,455.39 ccw(c1552.56,478.11) 1584.68,478.11 ccw(c1616.81,478.11) C16.2@1594.09,455.39 ; R17.2@1575.28,509.61 cw(c1552.56,486.89) 1584.68,486.89 cw(c1616.81,486.89) R17.2@1594.09,509.61 ; R17.2@1577.42,532.14 cw(c1565.48,550.48) 1550,535 ; R17.2@1580.13,506.51 cw(c1577.75,500) 1584.68,500 ; C16.2@1584.68,445 1584.68,500 ; R17.2@1584.68,520 1565,520 ; R17.2@1589.24,506.51 ccw(c1591.62,500) 1584.68,500 ; 1589.68,485 1707.87,485 Y2.2@1735,457.87 ; R17.2@1589.68,505 1584.68,500 ; Y2.2@1715.31,461.37 ccw(c1688.94,466.06) 1707.88,485 ccw(c1726.82,503.94) Y2.2@1731.5,477.57 ; U5.5@1961.5,698.9 1593.9,698.9 1550,655 1550,535 ; 1550,535 1565,520
NetC17_2: C17.2 R17.1 U5.6 Y2.1 | length 1422.1
  Top Layer w10: R17.1@1635.91,530.39 ccw(c1601.12,565.18) 1650.31,565.18 ; C17.2@1635.91,584.61 cw(c1601.12,549.82) 1650.31,549.82 ; C17.2@1635.91,605.39 ccw(c1601.12,640.18) 1650.32,640.18 ; R17.1@1642.98,523.32 ccw(c1625.26,541.04) 1650.31,541.04 ccw(c1665.37,541.04) R17.1@1654.72,530.39 ; C17.2@1642.98,591.68 cw(c1625.26,573.96) 1650.31,573.96 cw(c1665.37,573.96) C17.2@1654.72,584.61 ; C17.2@1642.98,598.32 ccw(c1625.26,616.04) 1650.32,616.04 ccw(c1665.37,616.04) C17.2@1654.72,605.39 ; R17.1@1650.31,505 1650.31,585 1650.32,660.32 1669.21,679.21 ; 1682.58,679.21 cw(c1682.58,634.57) Y2.1@1725.41,647.18 ; 1695.95,679.21 cw(c1695.95,638.51) Y2.1@1735,650 ; 1709.32,679.21 cw(c1709.32,642.44) Y2.1@1744.59,652.82 ; Y2.1@1715.81,644.35 ccw(c1669.22,630.64) 1669.22,679.21 ; Y2.1@1720.86,664.14 cw(c1757.24,627.76) 1757.24,679.21 ; 1722.69,679.21 cw(c1722.69,646.38) Y2.1@1754.19,655.65 ; Y2.1@1727.93,657.07 cw(c1781.38,603.62) 1781.38,679.21 ; Y2.1@1731.29,669.65 ccw(c1729.49,679.21) 1739.21,679.21 ; Y2.1@1739.21,654.21 1739.21,679.21 ; Y2.1@1742.07,642.93 cw(c1829.67,555.33) 1829.67,679.21 ; Y2.1@1745.96,666.73 cw(c1754.13,679.21) 1739.21,679.21 ; Y2.1@1749.14,635.86 cw(c1853.81,531.19) 1853.81,679.21 ; 1805.52,679.21 ccw(c1805.52,579.48) Y2.1@1735,650 ; U5.6@1961.5,679.21 1739.21,679.21 ; 1669.21,679.21 1739.21,679.21 ; Y2.1@1735,650 1735,675 1739.21,679.21
NetC18_2: C18.2 R18.2 U5.13 | length 290.7
  Top Layer w10: R18.2@1855.91,515.39 ccw(c1833.19,538.11) 1865.31,538.11 ccw(c1897.44,538.11) R18.2@1874.72,515.39 ; C18.2@1855.91,589.61 cw(c1833.19,566.89) 1865.32,566.89 cw(c1897.44,566.89) C18.2@1874.72,589.61 ; R18.2@1865.32,505 C18.2@1865.32,600 ; 1866.73,541.42 U5.13@1961.5,541.42
NetC27_2: C27.2 Q5.3 R27.1 RELAY3.3 | length 1044.6
  Top Layer w10: RELAY3.3@3169.66,1502.18 ccw(c3199.06,1531.58) 3199.06,1490 ; RELAY3.3@3175.43,1490 3295,1490 3343,1442 3343,1342 3380,1305 3470.31,1305 ; RELAY3.3@3176.73,1509.25 ccw(c3223.2,1555.72) 3223.2,1490 ; RELAY3.3@3183.8,1481.63 cw(c3204,1461.43) 3204,1490 ; RELAY3.3@3183.8,1516.32 ccw(c3247.34,1579.86) 3247.34,1490 ; R27.1@3460.91,1259.61 cw(c3438.19,1236.89) 3470.31,1236.89 cw(c3502.44,1236.89) R27.1@3479.72,1259.61 ; R27.1@3460.91,1280.39 ccw(c3438.19,1303.11) 3470.31,1303.11 ccw(c3502.44,1303.11) R27.1@3479.72,1280.39 ; C27.2@3460.91,1334.61 cw(c3438.19,1311.89) 3470.31,1311.89 cw(c3502.44,1311.89) C27.2@3479.72,1334.61 ; 3470.31,1146.54 ccw(c3494.92,1146.54) Q5.3@3477.52,1129.14 ; 3470.31,1170.68 ccw(c3519.07,1170.68) Q5.3@3484.59,1136.21 ; C27.2@3470.31,1345 3470.31,1305 ; Q5.3@3489.21,1130 3480,1130 3470.31,1139.68 3470.31,1305
NetD1_2: D1.2 D3.1 | length 301.2
  Top Layer w10: D3.1@2170,300 2175,305 D3.1@2188.54,305
  Top Layer w25: D1.2@2152.63,222.37 ccw(c2122.75,252.25) 2165,252.25 ccw(c2207.25,252.25) D1.2@2177.37,222.37 ; D1.2@2165,210 2165,295 D3.1@2170,300 ; D1.2@2165,236.97 cw(c2243.22,236.97) D3.1@2187.91,292.29 ; 2165,297.33 cw(c2182.87,297.33) D3.1@2170.23,309.96 ; 2172.35,264.4 ccw(c2225.76,250.09) D1.2@2179.61,219.64
NetD2_2: D2.2 R26.2 | length 344.5
  Top Layer w10: D2.2@2620.53,426.98 cw(c2601.17,407.63) 2628.54,407.63 cw(c2655.92,407.63) D2.2@2636.56,426.98 ; D2.2@2626.22,425.18 cw(c2618.05,411.03) 2633.83,415.26 ; 2628.54,397.83 ccw(c2667.41,397.83) R26.2@2646,365.4 ; 2628.54,416.41 ccw(c2679.67,416.41) R26.2@2651.51,373.74 ; 2635.59,408.71 cw(c2654.68,413.83) D2.2@2640.2,427.28 ; R26.2@2636.38,371.38 ccw(c2609.59,372.19) 2628.54,391.14 ; R26.2@2648.24,384.21 cw(c2645.62,408.21) 2628.54,391.14 ; R26.2@2649.68,370 2628.54,391.14 ; R26.2@2657.02,382.09 cw(c2691.94,435) D2.2@2628.54,435 2628.54,391.14
NetG_L_A: G_L.A R23.2 | length 220.3
  Top Layer w10: R23.2@2635.28,515.39 ccw(c2624.63,526.04) 2639.68,526.04 ccw(c2664.74,526.04) R23.2@2647.02,508.32 ; G_L.A@2635.28,569.61 cw(c2624.63,558.96) 2639.68,558.96 cw(c2664.74,558.96) G_L.A@2647.02,576.68 ; R23.2@2639.68,515 G_L.A@2639.68,595 ; 2639.68,534.82 cw(c2688.88,534.82) G_L.A@2654.09,569.61 ; 2639.68,550.18 ccw(c2688.88,550.18) R23.2@2654.09,515.39
NetG_L_K: G_L.K U6.3 | length 507
  Top Layer w10: G_L.K@2695.91,590.39 ccw(c2685.26,601.04) 2700.31,601.04 ccw(c2725.37,601.04) G_L.K@2707.65,583.32 ; G_L.K@2700.31,580 2700.31,635.31 2730,665 2730,870 2763.39,903.39 U6.3@2810,903.39 ; 2700.31,625.18 ccw(c2749.51,625.18) G_L.K@2714.72,590.39 ; U6.3@2788.15,895.79 ccw(c2769.8,877.44) 2769.8,903.39 ccw(c2769.8,929.33) U6.3@2788.15,910.99
NetIPX2_2: IPX2.2 U6.11 | length 747.5
  Top Layer w30: U6.11@2810,482.13 2892.13,482.13 3080,670 3430,670 3439.06,660.94 IPX2.2@3439.06,624.06
NetIPX_2: IPX.2 R36.2 | length 76.6
  Top Layer w40: R36.2@411,1341 IPX.2@411,1417.64
NetLED1_A: LED1.A R33.1 | length 225.6
  Top Layer w10: LED1.A@465,110.31 R33.1@555,110.31 ; LED1.A@468.32,122.65 ccw(c498.11,152.44) 498.11,110.31 ; LED1.A@475.39,129.72 ccw(c522.25,176.58) 522.25,110.31 ; R33.1@544.61,100.91 ccw(c521.89,78.19) 521.89,110.31 ccw(c521.89,142.44) R33.1@544.61,119.72